# EAGLE board xbeeshield-v13 (EAGLE 5.00)
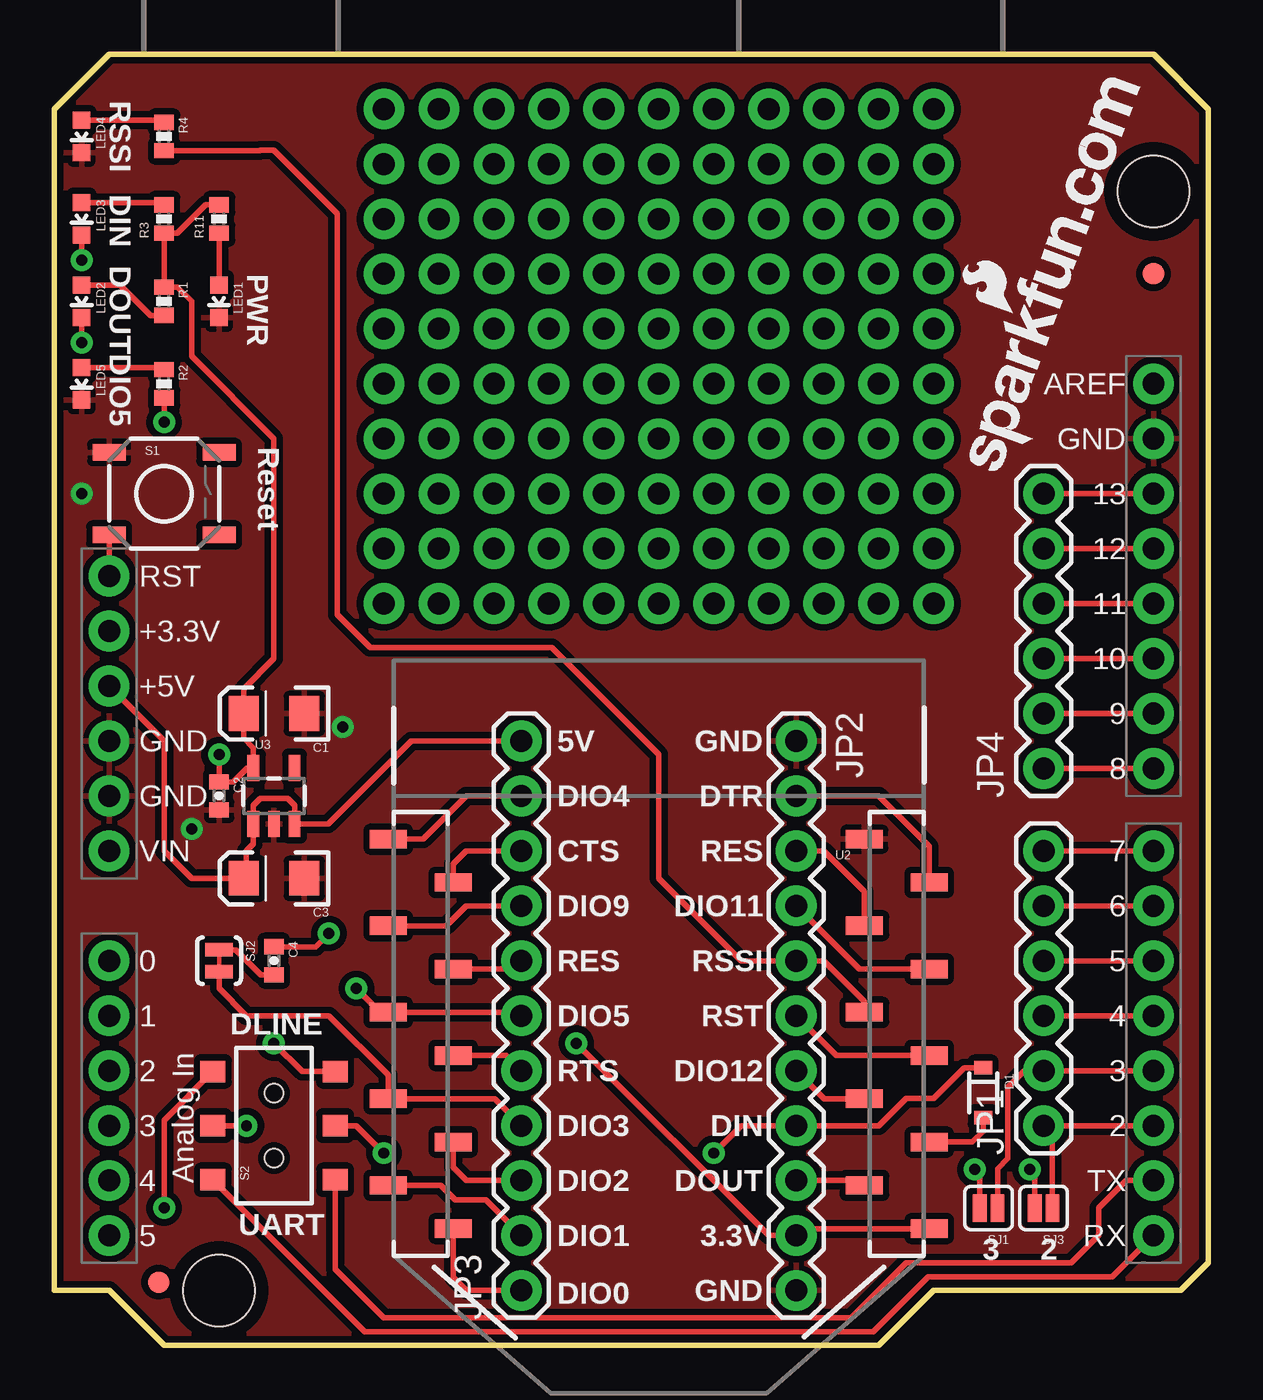
[diagram p0: board, top side]
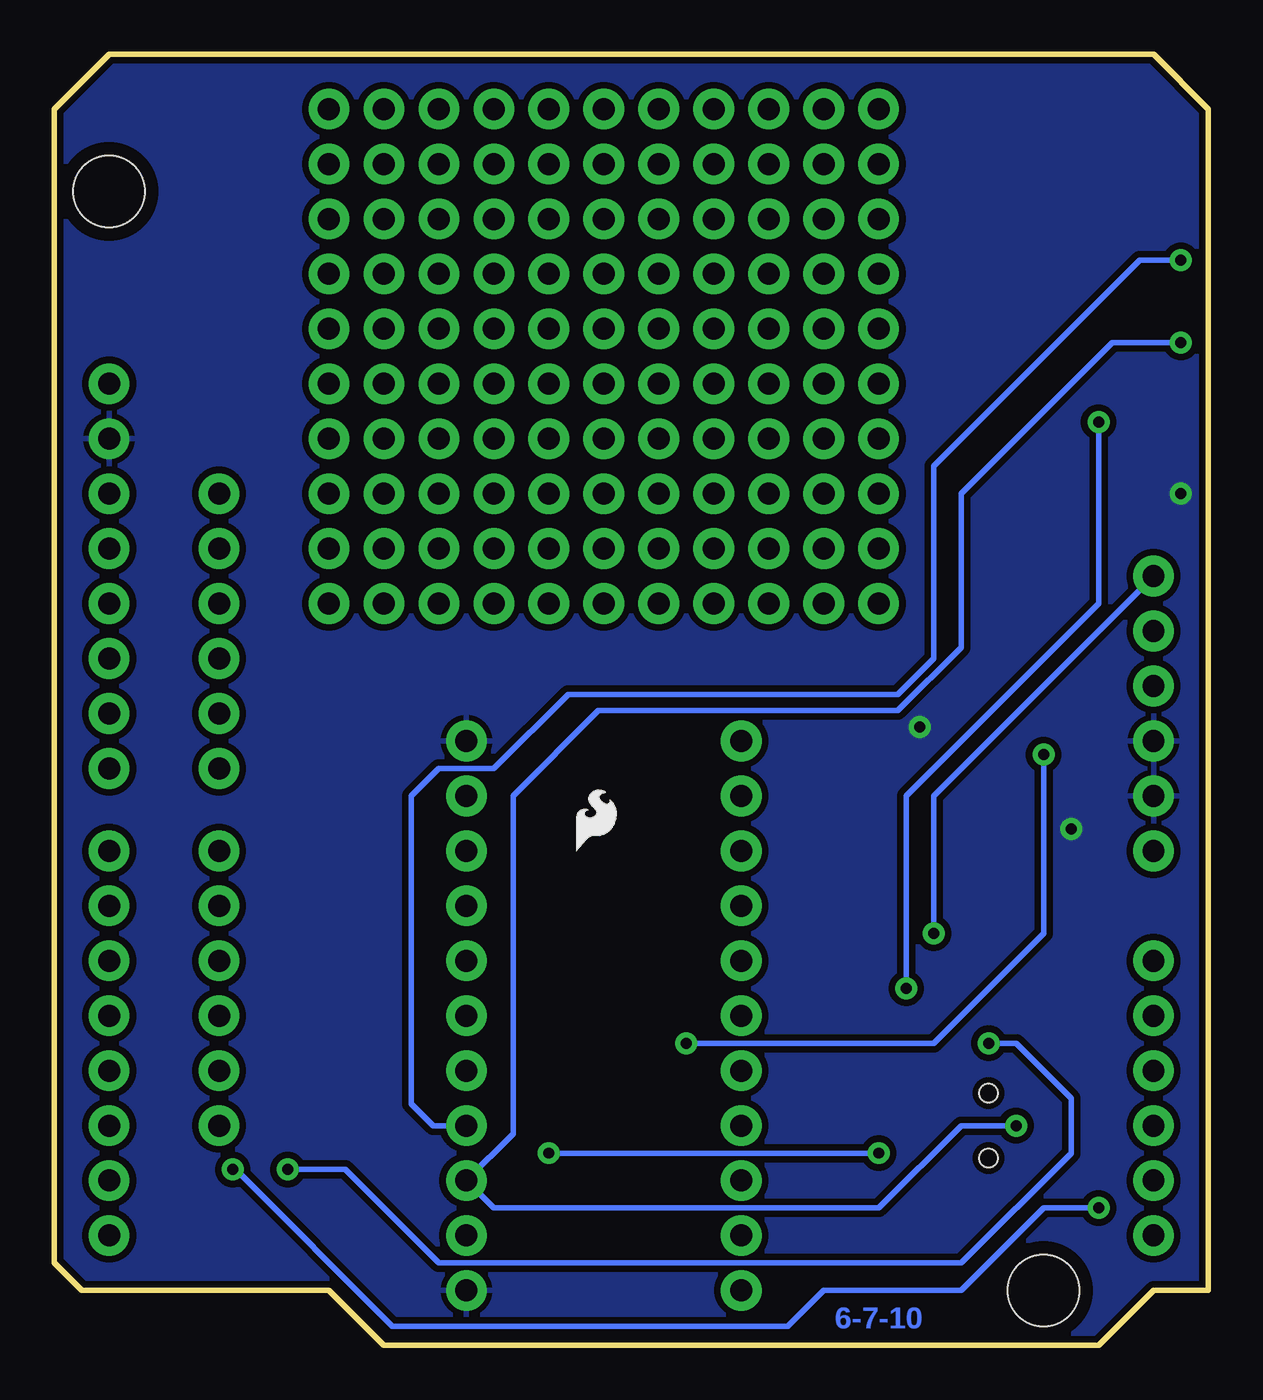
[diagram p1: board, bottom side, seen from below]

Size 53.34 x 59.69 mm. Coordinates in mm from the lower left corner, seen from the top.
Outline: 0,2.54 0,57.15 2.54,59.69 50.8,59.69 53.34,57.15 53.34,3.81 52.07,2.54 40.64,2.54 38.1,0 5.08,0 2.54,2.54 0,2.54
Copper layers (1*16): Top 0.035mm / dielectric 1.5mm / Bottom 0.035mm
Design rules "SparkFun": minimum track width 8mil, minimum drill 20mil, track to track 8mil, track to pad 8mil, pad to pad 8mil, via to via 8mil, smd to smd 8mil, copper to edge 8mil, drill to drill 8mil, minimum pad ring 12mil, minimum via ring 10mil, stop-mask expansion 4mil, vias tented up to drill 20mil, thermal gap 10mil
Net classes: 0 default: width 0.203 mm; 1 vcc: width 0.305 mm

## Footprints (pad centres in the part's own frame; a part is rotated, then mirrored left to right if it is on the bottom)
EIA3216 = smd 1.4 x 1.6: A 1.4,0; C -1.4,0
0402-CAP = smd 0.7 x 0.9: 1 -0.65,0; 2 0.65,0
SOD-323 = smd 0.63 x 0.83: 1 -1.15,0; 2 1.15,0
1X06 = drill 1.016 pad 1.88 round: 1 0,0; 2 2.54,0; 3 5.08,0; 4 7.62,0; 5 10.16,0; 6 12.7,0
1X11 = drill 1.016 pad 1.88 round: 1 0,0; 2 2.54,0; 3 5.08,0; 4 7.62,0; 5 10.16,0; 6 12.7,0; 7 15.24,0; 8 17.78,0; 9 20.32,0; 10 22.86,0; 11 25.4,0
FIDUCIAL-1X2 = smd 1 x 1: 1 0,0
LED-0603 = smd 0.8 x 0.8: A 0,-0.75; C 0,0.75
0402-RES = smd 0.7 x 0.9: 1 -0.65,0; 2 0.65,0
TACTILE_SWITCH_SMD = smd 1.524 x 0.762: 1 -2.54,1.905; 2 2.54,1.905; 3 -2.54,-1.905; 4 2.54,-1.905
AYZ0202 = smd 1 x 1.15: 1 -2.5,2.825; 2 0,2.825; 3 2.5,2.825; 4 -2.5,-2.825; 5 0,-2.825; 6 2.5,-2.825 | hole 0.85: 1.5,0; -1.5,0
SJ_2S = smd 0.635 x 1.27: 1 -0.412,0; 2 0.412,0
SJ_2S-TRACE = smd 0.635 x 1.27: 1 -0.508,0; 2 0.508,0
DUEMILANOVE_SHIELD = drill 1.016 pad 1.88 round: 3.3V 50.8,26.67; 5V 50.8,29.21; A0 50.8,41.91; A1 50.8,44.45; A2 50.8,46.99; A3 50.8,49.53; A4 50.8,52.07; A5 50.8,54.61; AREF 2.54,15.24; D2 2.54,49.53; D3 2.54,46.99; D4 2.54,44.45; D5 2.54,41.91; D6 2.54,39.37; D7 2.54,36.83; D8 2.54,33.02; D9 2.54,30.48; D10 2.54,27.94; D11 2.54,25.4; D12 2.54,22.86; D13 2.54,20.32; GND@0 50.8,31.75; GND@1 50.8,34.29; GND@2 2.54,17.78; RES 50.8,24.13; RX 2.54,54.61; TX 2.54,52.07; VIN 50.8,36.83 | hole 3.302: 45.72,57.15; 2.54,6.35
XBEE-SMD = smd 1.7 x 0.85: 1 -12.5,20; 2 -9.5,18; 3 -12.5,16; 4 -9.5,14; 5 -12.5,12; 6 -9.5,10; 7 -12.5,8; 8 -9.5,6; 9 -12.5,4; 10 -9.5,2; 11 12.5,2; 12 9.5,4; 13 12.5,6; 14 9.5,8; 15 12.5,10; 16 9.5,12; 17 12.5,14; 18 9.5,16; 19 12.5,18; 20 9.5,20
SOT23-5 = smd 0.55 x 1.2: 1 -0.95,-1.3; 2 0,-1.3; 3 0.95,-1.3; 4 0.95,1.3; 5 -0.95,1.3

## Placement (x,y rotation side)
C1  10uF  [EIA3216]  10.16,29.21 180 top
C2  0.1uF  [0402-CAP]  7.62,25.4 270 top
C3  10uF  [EIA3216]  10.16,21.59 180 top
C4  0.1uF  [0402-CAP]  10.16,17.78 270 top
D1  [SOD-323]  42.93,11.68 270 top
JP1  [1X06]  45.72,10.16 90 top
JP2  M11PTH  [1X11]  34.29,27.94 270 top
JP3  M11PTH  [1X11]  21.59,2.54 90 top
JP4  [1X06]  45.72,26.67 90 top
JP5  FIDUCIAL1X2  [FIDUCIAL-1X2]  4.83,2.92 0 top
JP6  FIDUCIAL1X2  [FIDUCIAL-1X2]  50.8,49.53 0 top
LED1  Red  [LED-0603]  7.62,48.26 180 top
LED2  Red  [LED-0603]  1.27,48.26 180 top
LED3  Green  [LED-0603]  1.27,52.07 180 top
LED4  Green  [LED-0603]  1.27,55.88 180 top
LED5  Green  [LED-0603]  1.27,44.45 180 top
R1  1K  [0402-RES]  5.08,48.26 270 top
R2  1K  [0402-RES]  5.08,44.45 270 top
R3  1K  [0402-RES]  5.08,52.07 90 top
R4  1K  [0402-RES]  5.08,55.88 270 top
R11  1K  [0402-RES]  7.62,52.07 90 top
S1  SWITCH-MOMENTARY-2SMD  [TACTILE_SWITCH_SMD]  5.08,39.37 0 top
S2  SWITCH-DPDTSMD  [AYZ0202]  10.16,10.16 90 top
SJ1  D_TX  [SJ_2S]  43.18,6.35 180 top
SJ2  SOLDERJUMPERTRACE  [SJ_2S-TRACE]  7.62,17.78 270 top
SJ3  D_RX  [SJ_2S]  45.72,6.35 180 top
U1  ARDUINO_SHIELD  [DUEMILANOVE_SHIELD]  53.34,59.69 180 top
U2  XBEE-1B3  [XBEE-SMD]  27.94,25.4 180 top
U3  3.3V_REG  [SOT23-5]  10.16,25.4 0 top
U$1  LOGO-SFESK  [SFE-LOGO-FLAME]  29.21,22.86 0 bottom
U$4  LOGO-SFENEW  [SFE-NEW-WEBLOGO]  44.54,39.97 70 top
U$5  CREATIVE_COMMONS  [CREATIVE_COMMONS]  20.32,-10.16 0 top  (outside the outline)

## Library data of the parts
C1-C4 D1 JP1-JP6 LED1-LED5 R1-R4 R11 S1 S2 SJ1-SJ3 U1-U3 U$1 U$4 U$5 = SparkFun

## Nets
3.3V: C1.A C2.1 JP2.10 R1.1 R3.1 R11.2 U2.1 U3.5
5V: C3.A JP3.11 U1.5V U3.1 U3.3
CTS: JP3.9 U2.12
D_RX: JP1.1 SJ3.1 U1.D2
D_TX: JP1.2 SJ1.1 U1.D3
DIN: D1.1 JP2.8 LED3.C S2.5
DIO0: JP3.1 U2.20
DIO1: JP3.2 U2.19
DIO2: JP3.3 U2.18
DIO3: JP3.4 SJ2.2 U2.17
DIO4: JP3.10 U2.11
DIO5: JP3.6 R2.2 U2.15
DIO9: JP3.8 U2.13
DIO11: JP2.4 U2.7
DIO12: JP2.7 U2.4
DOUT: JP2.9 LED2.C S2.2 U2.2
DTR: JP2.2 U2.9
GND: C1.C C2.2 C3.C JP2.1 JP2.11 LED1.C LED4.C LED5.C S1.1 U1.GND@0 U1.GND@1 U1.GND@2 U2.10 U3.2
N$1: LED2.A R1.2
N$2: LED4.A R4.1
N$3: D1.2 U2.3
N$4: LED3.A R3.2
N$5: C4.2 SJ2.1
N$17: JP4.1 U1.D8
N$18: JP4.2 U1.D9
N$30: JP4.3 U1.D10
N$38: LED1.A R11.1
N$43: JP4.4 U1.D11
N$55: JP4.5 U1.D12
N$67: JP4.6 U1.D13
N$139: LED5.A R2.1
N$140: S2.6 SJ1.2
N$141: S2.3 SJ3.2
N$142: JP1.3 U1.D4
N$143: JP1.4 U1.D5
N$144: JP1.5 U1.D6
N$145: JP1.6 U1.D7
RES1: JP2.3 U2.8
RES2: JP3.7 U2.14
RESET: JP2.6 U2.5
RSSI: JP2.5 R4.2 U2.6
RST: C4.1 S1.3 U1.RES
RTS: JP3.5 U2.16
UART_RX: S2.1 U1.RX
UART_TX: S2.4 U1.TX

## Tracks (layer width: path | path; a pad name or v marks a point on that pad's centre or on a via)
3.3V  (via drill 0.51)
  Top 0.254: R11.2 7,52.72 5.7,51.42 R3.1 R1.1 5.7,48.91 6.35,48.26 6.35,45.72 10.16,41.91 10.16,31.75 8.76,30.35 C1.A 8.76,28.07 9.21,27.62 U3.5 8.92,26.7 8.27,26.05 C2.1 v7.62,27.3 | U2.1 34.61,5.4 JP2.10 33.02,5.08 v24.13,13.97
  Bottom 0.254: v24.13,13.97 12.7,13.97 7.62,19.05 v7.62,27.3
5V
  Top 0.254: U1.5V 5.08,27.94 5.08,22.86 6.35,21.59 C3.A 8.89,21.72 8.89,22.86 9.21,23.18 U3.1 9.21,24.96 9.53,25.27 10.79,25.27 11.11,24.96 U3.3 12.67,24.1 16.51,27.94 JP3.11
CTS
  Top 0.254: U2.12 18.44,22.25 19.05,22.86 JP3.9
D_RX
  Top 0.254: U1.D2 JP1.1 46.13,9.75 SJ3.1
D_TX
  Top 0.254: U1.D3 JP1.2 44.83,12.7 44.07,11.94 44.07,8.64 43.59,8.16 SJ1.1
DIN  (via drill 0.51)
  Top 0.254: v1.27,50.16 LED3.C | D1.1 42.04,12.83 40.64,11.43 39.37,11.43 38.1,10.16 JP2.8 31.75,10.16 v30.48,8.89 | S2.5 13.97,10.16 v15.24,8.89
  Bottom 0.254: v1.27,50.16 3.17,50.16 12.7,40.64 12.7,31.75 14.35,30.1 29.59,30.1 33.02,26.67 35.56,26.67 36.83,25.4 36.83,11.18 35.81,10.16 JP2.8 | v15.24,8.89 v30.48,8.89
DIO0
  Top 0.254: U2.20 18.44,3.15 19.05,2.54 JP3.1
DIO1
  Top 0.254: JP3.2 19.94,6.73 18.54,6.73 17.87,7.4 U2.19
DIO2
  Top 0.254: U2.18 18.44,8.23 19.05,7.62 JP3.3
DIO3
  Top 0.254: JP3.4 20.35,11.4 U2.17 15.44,12.5 12.7,15.24 8.89,15.24 7.62,16.51 SJ2.2
DIO4
  Top 0.254: U2.11 17.05,23.4 19.05,25.4 JP3.10
DIO5  (via drill 0.51)
  Top 0.254: v5.08,42.67 R2.2 | JP3.6 21.43,15.4 U2.15 15.08,15.4 v13.97,16.51
  Bottom 0.254: v13.97,16.51 13.97,25.4 5.08,34.29 v5.08,42.67
DIO9
  Top 0.254: U2.13 18.13,19.4 19.05,20.32 JP3.8
DIO11
  Top 0.254: U2.7 37.21,17.4 JP2.4
DIO12
  Top 0.254: U2.4 35.59,11.4 JP2.7
DOUT  (via drill 0.51)
  Top 0.254: v1.27,46.35 LED2.C | JP2.9 37.22,7.62 U2.2 | S2.2 v8.89,10.16
  Bottom 0.254: v1.27,46.35 4.45,46.35 11.43,39.37 11.43,32.26 14.35,29.34 28.19,29.34 32.13,25.4 32.13,9.78 JP2.9 33.02,6.35 15.24,6.35 11.43,10.16 v8.89,10.16
DTR
  Top 0.254: JP2.2 38.1,25.4 40.44,23.06 U2.9
GND  (via drill 0.51)
  other vias: 1.27,39.37 6.35,23.88 13.34,28.57
  pour Top (isolate 0.305): 0,0 0,59.69 53.34,59.69 53.34,0
  pour Bottom (isolate 0.305): 0,59.69 0,0 53.34,0 53.34,59.69
N$1
  Top 0.254: LED2.A 3.06,49.01 4.46,47.61 R1.2
N$2
  Top 0.254: LED4.A 4.98,56.63 R4.1
N$3
  Top 0.254: U2.3 42.42,9.4 42.93,9.91 D1.2
N$4
  Top 0.254: LED3.A 4.98,52.82 R3.2
N$5
  Top 0.254: C4.2 9.54,17.13 8.38,18.29 SJ2.1
N$17
  Top 0.254: JP4.1 U1.D8
N$18
  Top 0.254: JP4.2 U1.D9
N$19  (via drill 1.02 pad 1.88)
  other vias: 40.64,34.29
N$20  (via drill 1.02 pad 1.88)
  other vias: 38.1,34.29
N$21  (via drill 1.02 pad 1.88)
  other vias: 35.56,34.29
N$22  (via drill 1.02 pad 1.88)
  other vias: 33.02,34.29
N$23  (via drill 1.02 pad 1.88)
  other vias: 30.48,34.29
N$24  (via drill 1.02 pad 1.88)
  other vias: 27.94,34.29
N$25  (via drill 1.02 pad 1.88)
  other vias: 25.4,34.29
N$26  (via drill 1.02 pad 1.88)
  other vias: 22.86,34.29
N$27  (via drill 1.02 pad 1.88)
  other vias: 20.32,34.29
N$28  (via drill 1.02 pad 1.88)
  other vias: 17.78,34.29
N$29  (via drill 1.02 pad 1.88)
  other vias: 15.24,34.29
N$30
  Top 0.254: JP4.3 U1.D10
N$31  (via drill 1.02 pad 1.88)
  other vias: 40.64,36.83
N$32  (via drill 1.02 pad 1.88)
  other vias: 38.1,36.83
N$33  (via drill 1.02 pad 1.88)
  other vias: 35.56,36.83
N$34  (via drill 1.02 pad 1.88)
  other vias: 33.02,36.83
N$35  (via drill 1.02 pad 1.88)
  other vias: 30.48,36.83
N$36  (via drill 1.02 pad 1.88)
  other vias: 27.94,36.83
N$37  (via drill 1.02 pad 1.88)
  other vias: 25.4,36.83
N$38
  Top 0.254: LED1.A R11.1
N$39  (via drill 1.02 pad 1.88)
  other vias: 22.86,36.83
N$40  (via drill 1.02 pad 1.88)
  other vias: 20.32,36.83
N$41  (via drill 1.02 pad 1.88)
  other vias: 17.78,36.83
N$42  (via drill 1.02 pad 1.88)
  other vias: 15.24,36.83
N$43
  Top 0.254: JP4.4 U1.D11
N$44  (via drill 1.02 pad 1.88)
  other vias: 40.64,39.37
N$45  (via drill 1.02 pad 1.88)
  other vias: 38.1,39.37
N$46  (via drill 1.02 pad 1.88)
  other vias: 35.56,39.37
N$47  (via drill 1.02 pad 1.88)
  other vias: 33.02,39.37
N$48  (via drill 1.02 pad 1.88)
  other vias: 30.48,39.37
N$49  (via drill 1.02 pad 1.88)
  other vias: 27.94,39.37
N$50  (via drill 1.02 pad 1.88)
  other vias: 25.4,39.37
N$51  (via drill 1.02 pad 1.88)
  other vias: 22.86,39.37
N$52  (via drill 1.02 pad 1.88)
  other vias: 20.32,39.37
N$53  (via drill 1.02 pad 1.88)
  other vias: 17.78,39.37
N$54  (via drill 1.02 pad 1.88)
  other vias: 15.24,39.37
N$55
  Top 0.254: JP4.5 U1.D12
N$56  (via drill 1.02 pad 1.88)
  other vias: 40.64,41.91
N$57  (via drill 1.02 pad 1.88)
  other vias: 38.1,41.91
N$58  (via drill 1.02 pad 1.88)
  other vias: 35.56,41.91
N$59  (via drill 1.02 pad 1.88)
  other vias: 33.02,41.91
N$60  (via drill 1.02 pad 1.88)
  other vias: 30.48,41.91
N$61  (via drill 1.02 pad 1.88)
  other vias: 27.94,41.91
N$62  (via drill 1.02 pad 1.88)
  other vias: 25.4,41.91
N$63  (via drill 1.02 pad 1.88)
  other vias: 22.86,41.91
N$64  (via drill 1.02 pad 1.88)
  other vias: 20.32,41.91
N$65  (via drill 1.02 pad 1.88)
  other vias: 17.78,41.91
N$66  (via drill 1.02 pad 1.88)
  other vias: 15.24,41.91
N$67
  Top 0.254: JP4.6 U1.D13
N$68  (via drill 1.02 pad 1.88)
  other vias: 40.64,44.45
N$69  (via drill 1.02 pad 1.88)
  other vias: 38.1,44.45
N$70  (via drill 1.02 pad 1.88)
  other vias: 35.56,44.45
N$71  (via drill 1.02 pad 1.88)
  other vias: 33.02,44.45
N$72  (via drill 1.02 pad 1.88)
  other vias: 30.48,44.45
N$73  (via drill 1.02 pad 1.88)
  other vias: 27.94,44.45
N$74  (via drill 1.02 pad 1.88)
  other vias: 25.4,44.45
N$75  (via drill 1.02 pad 1.88)
  other vias: 22.86,44.45
N$76  (via drill 1.02 pad 1.88)
  other vias: 20.32,44.45
N$77  (via drill 1.02 pad 1.88)
  other vias: 17.78,44.45
N$78  (via drill 1.02 pad 1.88)
  other vias: 15.24,44.45
N$80  (via drill 1.02 pad 1.88)
  other vias: 40.64,46.99
N$81  (via drill 1.02 pad 1.88)
  other vias: 38.1,46.99
N$82  (via drill 1.02 pad 1.88)
  other vias: 35.56,46.99
N$83  (via drill 1.02 pad 1.88)
  other vias: 33.02,46.99
N$84  (via drill 1.02 pad 1.88)
  other vias: 30.48,46.99
N$85  (via drill 1.02 pad 1.88)
  other vias: 27.94,46.99
N$86  (via drill 1.02 pad 1.88)
  other vias: 25.4,46.99
N$87  (via drill 1.02 pad 1.88)
  other vias: 22.86,46.99
N$88  (via drill 1.02 pad 1.88)
  other vias: 20.32,46.99
N$89  (via drill 1.02 pad 1.88)
  other vias: 17.78,46.99
N$90  (via drill 1.02 pad 1.88)
  other vias: 15.24,46.99
N$92  (via drill 1.02 pad 1.88)
  other vias: 40.64,49.53
N$93  (via drill 1.02 pad 1.88)
  other vias: 38.1,49.53
N$94  (via drill 1.02 pad 1.88)
  other vias: 35.56,49.53
N$95  (via drill 1.02 pad 1.88)
  other vias: 33.02,49.53
N$96  (via drill 1.02 pad 1.88)
  other vias: 30.48,49.53
N$97  (via drill 1.02 pad 1.88)
  other vias: 27.94,49.53
N$98  (via drill 1.02 pad 1.88)
  other vias: 25.4,49.53
N$99  (via drill 1.02 pad 1.88)
  other vias: 22.86,49.53
N$100  (via drill 1.02 pad 1.88)
  other vias: 20.32,49.53
N$101  (via drill 1.02 pad 1.88)
  other vias: 17.78,49.53
N$102  (via drill 1.02 pad 1.88)
  other vias: 15.24,49.53
N$104  (via drill 1.02 pad 1.88)
  other vias: 40.64,52.07
N$105  (via drill 1.02 pad 1.88)
  other vias: 38.1,52.07
N$106  (via drill 1.02 pad 1.88)
  other vias: 35.56,52.07
N$107  (via drill 1.02 pad 1.88)
  other vias: 33.02,52.07
N$108  (via drill 1.02 pad 1.88)
  other vias: 30.48,52.07
N$109  (via drill 1.02 pad 1.88)
  other vias: 27.94,52.07
N$110  (via drill 1.02 pad 1.88)
  other vias: 25.4,52.07
N$111  (via drill 1.02 pad 1.88)
  other vias: 22.86,52.07
N$112  (via drill 1.02 pad 1.88)
  other vias: 20.32,52.07
N$113  (via drill 1.02 pad 1.88)
  other vias: 17.78,52.07
N$114  (via drill 1.02 pad 1.88)
  other vias: 15.24,52.07
N$116  (via drill 1.02 pad 1.88)
  other vias: 40.64,54.61
N$117  (via drill 1.02 pad 1.88)
  other vias: 38.1,54.61
N$118  (via drill 1.02 pad 1.88)
  other vias: 35.56,54.61
N$119  (via drill 1.02 pad 1.88)
  other vias: 33.02,54.61
N$120  (via drill 1.02 pad 1.88)
  other vias: 30.48,54.61
N$121  (via drill 1.02 pad 1.88)
  other vias: 27.94,54.61
N$122  (via drill 1.02 pad 1.88)
  other vias: 25.4,54.61
N$123  (via drill 1.02 pad 1.88)
  other vias: 22.86,54.61
N$124  (via drill 1.02 pad 1.88)
  other vias: 20.32,54.61
N$125  (via drill 1.02 pad 1.88)
  other vias: 17.78,54.61
N$126  (via drill 1.02 pad 1.88)
  other vias: 15.24,54.61
N$128  (via drill 1.02 pad 1.88)
  other vias: 40.64,57.15
N$129  (via drill 1.02 pad 1.88)
  other vias: 38.1,57.15
N$130  (via drill 1.02 pad 1.88)
  other vias: 35.56,57.15
N$131  (via drill 1.02 pad 1.88)
  other vias: 33.02,57.15
N$132  (via drill 1.02 pad 1.88)
  other vias: 30.48,57.15
N$133  (via drill 1.02 pad 1.88)
  other vias: 27.94,57.15
N$134  (via drill 1.02 pad 1.88)
  other vias: 25.4,57.15
N$135  (via drill 1.02 pad 1.88)
  other vias: 22.86,57.15
N$136  (via drill 1.02 pad 1.88)
  other vias: 20.32,57.15
N$137  (via drill 1.02 pad 1.88)
  other vias: 17.78,57.15
N$138  (via drill 1.02 pad 1.88)
  other vias: 15.24,57.15
N$139
  Top 0.254: LED5.A 4.98,45.2 R2.1
N$140  (via drill 0.51)
  Top 0.254: v42.55,8.13 42.77,7.91 SJ1.2 | S2.6 11.47,12.66 v10.16,13.97
  Bottom 0.254: v42.55,8.13 39.88,8.13 35.56,3.81 11.43,3.81 6.35,8.89 6.35,11.43 8.89,13.97 v10.16,13.97
N$141  (via drill 0.51)
  Top 0.254: v45.09,8.13 45.31,7.91 SJ3.2 | v5.08,6.35 5.08,10.4 S2.3
  Bottom 0.254: v45.09,8.13 44.96,8.13 37.72,0.89 19.43,0.89 17.78,2.54 11.43,2.54 7.62,6.35 v5.08,6.35
N$142
  Top 0.254: JP1.3 U1.D4
N$143
  Top 0.254: JP1.4 U1.D5
N$144
  Top 0.254: JP1.5 U1.D6
N$145
  Top 0.254: JP1.6 U1.D7
RES1
  Top 0.254: JP2.3 35.56,22.86 37.44,20.98 U2.8
RES2
  Top 0.254: U2.14 21.21,17.4 JP3.7
RESET
  Top 0.254: U2.5 36.13,13.4 JP2.6
RSSI
  Top 0.254: U2.6 37.44,15.9 35.56,17.78 JP2.5 31.75,17.78 27.94,21.59 27.94,27.3 22.99,32.26 14.61,32.26 13.08,33.78 13.08,52.32 10.16,55.24 9.53,55.24 9.51,55.23 R4.2
RST  (via drill 0.51)
  Top 0.254: U1.RES S1.3 | C4.1 12.08,18.43 v12.7,19.05
  Bottom 0.254: U1.RES 12.7,25.4 v12.7,19.05
RTS
  Top 0.254: U2.16 20.89,13.4 JP3.5
UART_RX
  Top 0.254: U1.RX 48.9,3.17 40.39,3.17 37.85,0.64 14.36,0.64 S2.1
UART_TX
  Top 0.254: S2.4 12.98,3.52 15.24,1.27 36.83,1.27 39.37,3.81 46.99,3.81 48.26,5.08 48.26,6.35 49.53,7.62 U1.TX

## Text on the board
Bottom: 6-7-10
tPlace: RSSI | DIN | DOUT | PWR | DIO5 | Reset | GND | 5V | DTR | DIO4 | RES | CTS | DIO11 | DIO9 | RSSI | RES | RST | DIO5 | DLINE | DIO12 | RTS | DIN | DIO3 | DOUT | DIO2 | 3.3V | UART | DIO1 | 3 | 2 | GND | DIO0
Reference: RSSI | DIN | DOUT | PWR | DIO5 | Reset | GND | 5V | DTR | DIO4 | RES | CTS | DIO11 | DIO9 | RSSI | RES | RST | DIO5 | DLINE | DIO12 | RTS | DIN | DIO3 | DOUT | DIO2 | 3.3V | UART | DIO1 | 3 | 2 | GND | DIO0